# Altium PCB 数粒机接收板12通道.PcbDoc (part 1 of 2)
Units mm, origin at the board's own origin, x right, y up, seen from the top; angles counter-clockwise.
Board outline 316 x 52 mm, 2 copper layers (Top Layer, Bottom Layer); 209 components, 115 nets, 614 pads, 284 vias.
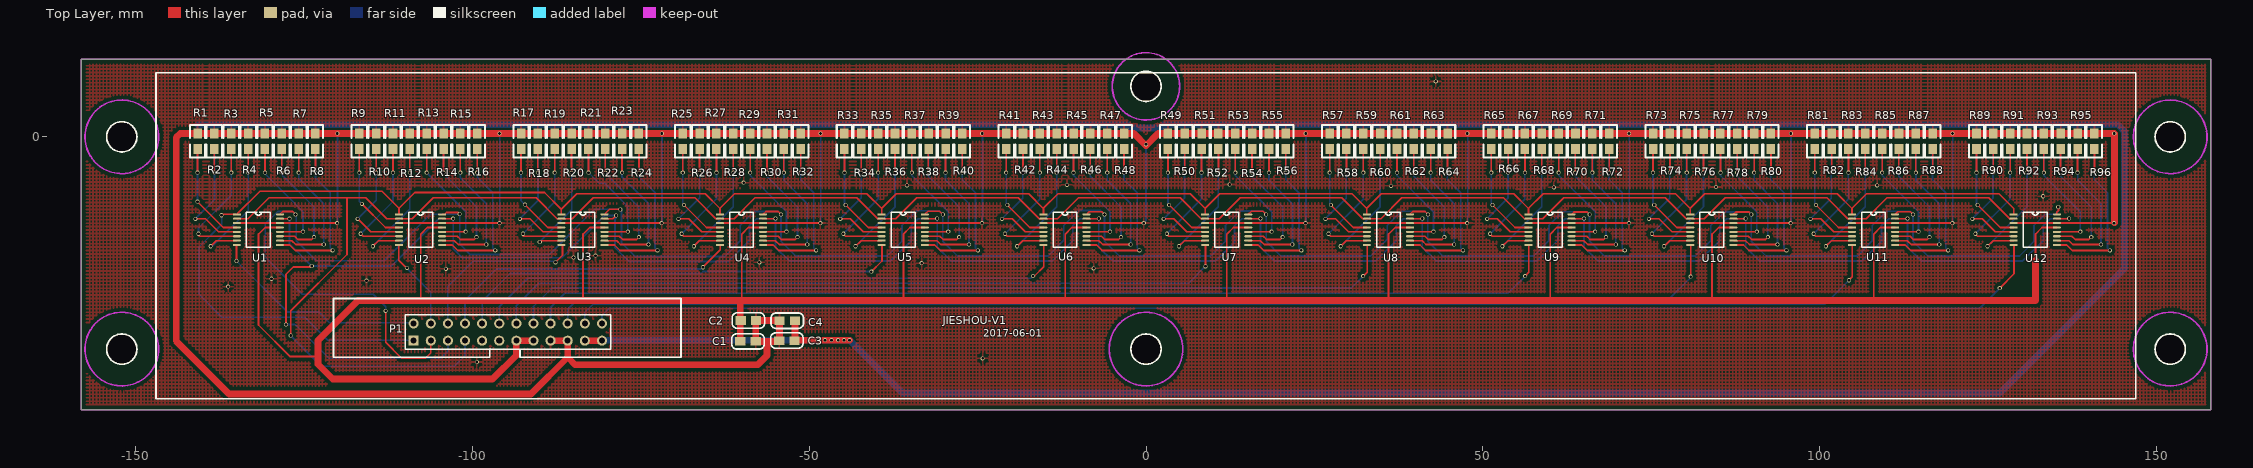
[diagram p0: Top Layer view]
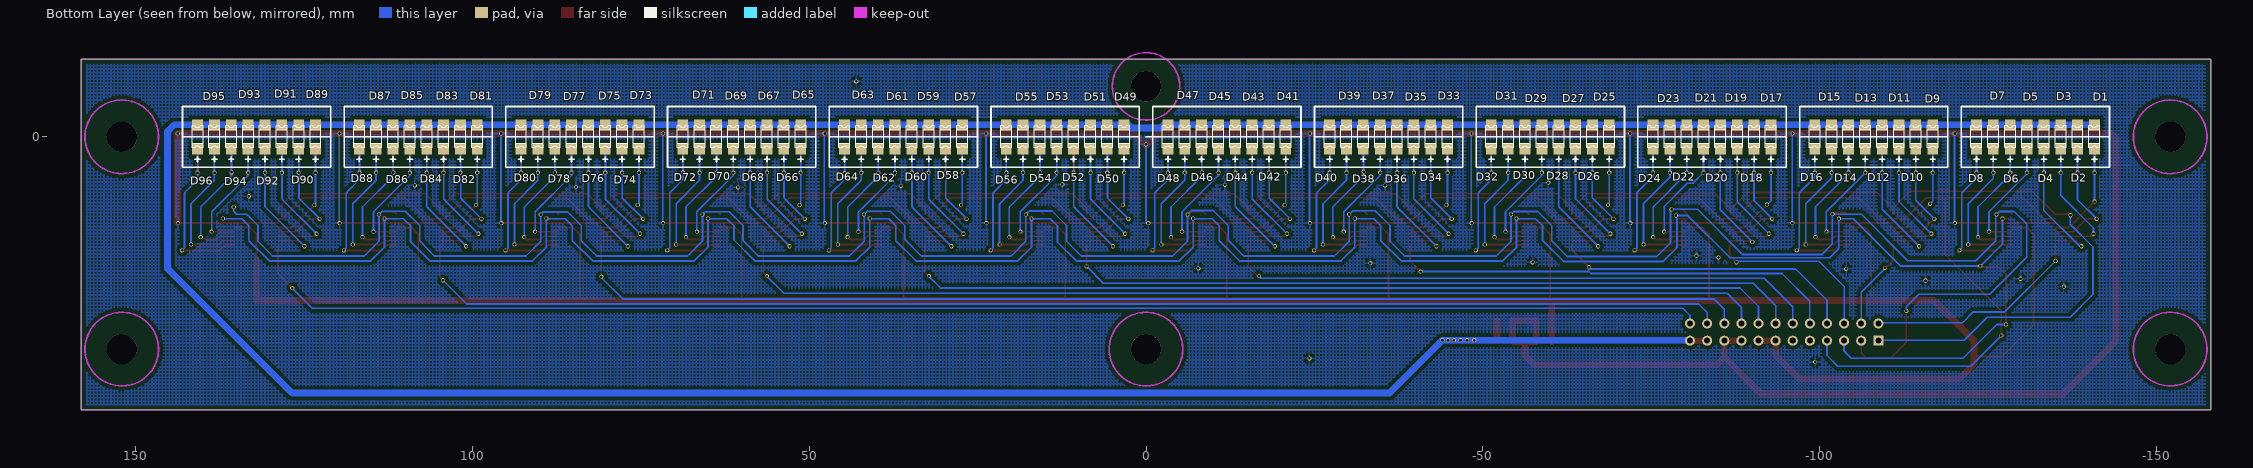
[diagram p1: Bottom Layer view, seen from below]

## Layer stack, top to bottom
Top Layer: signal copper 0.0356
Dielectric: dielectric 0.32, FR-4, Dk 4.8
Bottom Layer: signal copper 0.0356

## Board outline
-158,11.5 -158,-40.5 158,-40.5 158,11.5

## Design rules (kind name [scope] priority, off if disabled: settings)
Clearance Clearance_1 [InPolygon] p1: gap=0.508
Clearance [All] p2: gap=0.2
HoleSize [All] p1 off: absolutevalues=TRUE maxlimit=2.54 minlimit=0.025 maxpercent=80.000 minpercent=20.000
MinimumSolderMaskSliver [All] p1 off: minsoldermaskwidth=0.2
PolygonConnect [All] p1: connectstyle=Relief reliefconductorwidth=0.254 reliefentries=4 polygonreliefangle="90 Angle"
RoutingVias [All] p1: holewidth=0.254 width=0.6 viastyle="Through Hole" minholewidth=0.254 minwidth=0.6 maxholewidth=0.254 maxwidth=0.6
SilkToSilkClearance [All] p1: silktosilkclearance=-10
SilkscreenOverComponentPads [All] p1: minsilkscreentomaskgap=0
SolderMaskExpansion [All] p1: expansion=0.102
TestPointUsage [All] p1: valid=0 allowmultiple=FALSE
Testpoint [All] p1: side=3 testpointundercomponent=TRUE minsize=1.016 maxsize=2.54 preferedsize=1.524 minholesize=0 maxholesize=1.016 preferedholesize=0.813 testpointgrid=0.025 style=297 order=0123456789
Width [All] p1: maxlimit=2 minlimit=0.254 preferedwidth=0.254
20 further rules are at their usual default settings.

## Components (designator, comment, footprint, x,y, rotation, side; value= is the part's Value field where it differs from the comment)
C1 "贴片电容 10uf" 0805c -57.918,-30.357 r180 top
C2 "贴片电容" 0805c -57.868,-27.258 r180 top
C3 "贴片电容 10uf" 0805c -54.439,-30.23 r0 top
C4 "贴片电容" 0805c -54.388,-27.284 r0 top
D1 "红外接收珠子" jieshou1206 -140.75,-1.8 r0 bottom
D2 "红外接收珠子" jieshou1206 -138.25,-1.8 r0 bottom
D3 "红外接收珠子" jieshou1206 -135.75,-1.8 r0 bottom
D4 "红外接收珠子" jieshou1206 -133.25,-1.8 r0 bottom
D5 "红外接收珠子" jieshou1206 -130.75,-1.8 r0 bottom
D6 "红外接收珠子" jieshou1206 -128.25,-1.8 r0 bottom
D7 "红外接收珠子" jieshou1206 -125.75,-1.8 r0 bottom
D8 "红外接收珠子" jieshou1206 -123.25,-1.8 r0 bottom
D9 "红外接收珠子" jieshou1206 -116.75,-1.8 r0 bottom
D10 "红外接收珠子" jieshou1206 -114.25,-1.8 r0 bottom
D11 "红外接收珠子" jieshou1206 -111.75,-1.8 r0 bottom
D12 "红外接收珠子" jieshou1206 -109.25,-1.8 r0 bottom
D13 "红外接收珠子" jieshou1206 -106.75,-1.8 r0 bottom
D14 "红外接收珠子" jieshou1206 -104.25,-1.8 r0 bottom
D15 "红外接收珠子" jieshou1206 -101.75,-1.8 r0 bottom
D16 "红外接收珠子" jieshou1206 -99.25,-1.8 r0 bottom
D17 "红外接收珠子" jieshou1206 -92.75,-1.8 r0 bottom
D18 "红外接收珠子" jieshou1206 -90.25,-1.8 r0 bottom
D19 "红外接收珠子" jieshou1206 -87.75,-1.8 r0 bottom
D20 "红外接收珠子" jieshou1206 -85.25,-1.8 r0 bottom
D21 "红外接收珠子" jieshou1206 -82.75,-1.8 r0 bottom
D22 "红外接收珠子" jieshou1206 -80.25,-1.8 r0 bottom
D23 "红外接收珠子" jieshou1206 -77.75,-1.8 r0 bottom
D24 "红外接收珠子" jieshou1206 -75.25,-1.8 r0 bottom
D25 "红外接收珠子" jieshou1206 -68.75,-1.8 r0 bottom
D26 "红外接收珠子" jieshou1206 -66.25,-1.8 r0 bottom
D27 "红外接收珠子" jieshou1206 -63.75,-1.8 r0 bottom
D28 "红外接收珠子" jieshou1206 -61.25,-1.8 r0 bottom
D29 "红外接收珠子" jieshou1206 -58.75,-1.8 r0 bottom
D30 "红外接收珠子" jieshou1206 -56.25,-1.8 r0 bottom
D31 "红外接收珠子" jieshou1206 -53.75,-1.8 r0 bottom
D32 "红外接收珠子" jieshou1206 -51.25,-1.8 r0 bottom
D33 "红外接收珠子" jieshou1206 -44.75,-1.8 r0 bottom
D34 "红外接收珠子" jieshou1206 -42.25,-1.8 r0 bottom
D35 "红外接收珠子" jieshou1206 -39.75,-1.8 r0 bottom
D36 "红外接收珠子" jieshou1206 -37.25,-1.8 r0 bottom
D37 "红外接收珠子" jieshou1206 -34.75,-1.8 r0 bottom
D38 "红外接收珠子" jieshou1206 -32.25,-1.8 r0 bottom
D39 "红外接收珠子" jieshou1206 -29.75,-1.8 r0 bottom
D40 "红外接收珠子" jieshou1206 -27.25,-1.8 r0 bottom
D41 "红外接收珠子" jieshou1206 -20.75,-1.8 r0 bottom
D42 "红外接收珠子" jieshou1206 -18.25,-1.8 r0 bottom
D43 "红外接收珠子" jieshou1206 -15.75,-1.8 r0 bottom
D44 "红外接收珠子" jieshou1206 -13.25,-1.8 r0 bottom
D45 "红外接收珠子" jieshou1206 -10.75,-1.8 r0 bottom
D46 "红外接收珠子" jieshou1206 -8.25,-1.8 r0 bottom
D47 "红外接收珠子" jieshou1206 -5.75,-1.8 r0 bottom
D48 "红外接收珠子" jieshou1206 -3.25,-1.8 r0 bottom
D49 "红外接收珠子" jieshou1206 3.25,-1.8 r0 bottom
D50 "红外接收珠子" jieshou1206 5.75,-1.8 r0 bottom
D51 "红外接收珠子" jieshou1206 8.25,-1.8 r0 bottom
D52 "红外接收珠子" jieshou1206 10.75,-1.8 r0 bottom
D53 "红外接收珠子" jieshou1206 13.25,-1.8 r0 bottom
D54 "红外接收珠子" jieshou1206 15.75,-1.8 r0 bottom
D55 "红外接收珠子" jieshou1206 18.25,-1.8 r0 bottom
D56 "红外接收珠子" jieshou1206 20.75,-1.8 r0 bottom
D57 "红外接收珠子" jieshou1206 27.25,-1.8 r0 bottom
D58 "红外接收珠子" jieshou1206 29.75,-1.8 r0 bottom
D59 "红外接收珠子" jieshou1206 32.25,-1.8 r0 bottom
D60 "红外接收珠子" jieshou1206 34.75,-1.8 r0 bottom
D61 "红外接收珠子" jieshou1206 37.25,-1.8 r0 bottom
D62 "红外接收珠子" jieshou1206 39.75,-1.8 r0 bottom
D63 "红外接收珠子" jieshou1206 42.25,-1.8 r0 bottom
D64 "红外接收珠子" jieshou1206 44.75,-1.8 r0 bottom
D65 "红外接收珠子" jieshou1206 51.25,-1.8 r0 bottom
D66 "红外接收珠子" jieshou1206 53.75,-1.8 r0 bottom
D67 "红外接收珠子" jieshou1206 56.25,-1.8 r0 bottom
D68 "红外接收珠子" jieshou1206 58.75,-1.8 r0 bottom
D69 "红外接收珠子" jieshou1206 61.25,-1.8 r0 bottom
D70 "红外接收珠子" jieshou1206 63.75,-1.8 r0 bottom
D71 "红外接收珠子" jieshou1206 66.25,-1.8 r0 bottom
D72 "红外接收珠子" jieshou1206 68.75,-1.8 r0 bottom
D73 "红外接收珠子" jieshou1206 75.25,-1.8 r0 bottom
D74 "红外接收珠子" jieshou1206 77.75,-1.8 r0 bottom
D75 "红外接收珠子" jieshou1206 80.25,-1.8 r0 bottom
D76 "红外接收珠子" jieshou1206 82.75,-1.8 r0 bottom
D77 "红外接收珠子" jieshou1206 85.25,-1.8 r0 bottom
D78 "红外接收珠子" jieshou1206 87.75,-1.8 r0 bottom
D79 "红外接收珠子" jieshou1206 90.25,-1.8 r0 bottom
D80 "红外接收珠子" jieshou1206 92.75,-1.8 r0 bottom
D81 "红外接收珠子" jieshou1206 99.25,-1.8 r0 bottom
D82 "红外接收珠子" jieshou1206 101.75,-1.8 r0 bottom
D83 "红外接收珠子" jieshou1206 104.25,-1.8 r0 bottom
D84 "红外接收珠子" jieshou1206 106.75,-1.8 r0 bottom
D85 "红外接收珠子" jieshou1206 109.25,-1.8 r0 bottom
D86 "红外接收珠子" jieshou1206 111.75,-1.8 r0 bottom
D87 "红外接收珠子" jieshou1206 114.25,-1.8 r0 bottom
D88 "红外接收珠子" jieshou1206 116.75,-1.8 r0 bottom
D89 "红外接收珠子" jieshou1206 123.25,-1.8 r0 bottom
D90 "红外接收珠子" jieshou1206 125.75,-1.8 r0 bottom
D91 "红外接收珠子" jieshou1206 128.25,-1.8 r0 bottom
D92 "红外接收珠子" jieshou1206 130.75,-1.8 r0 bottom
D93 "红外接收珠子" jieshou1206 133.25,-1.8 r0 bottom
D94 "红外接收珠子" jieshou1206 135.75,-1.8 r0 bottom
D95 "红外接收珠子" jieshou1206 138.25,-1.8 r0 bottom
D96 "红外接收珠子" jieshou1206 140.75,-1.8 r0 bottom
P1 "牛角插座" HDR2X12 -108.682,-30.248 r0 top
R1 "贴片电阻" 0805r -140.758,0.486 r270 top
R2 "贴片电阻" 0805r -138.258,0.486 r270 top
R3 "贴片电阻" 0805r -135.758,0.486 r270 top
R4 "贴片电阻" 0805r -133.258,0.486 r270 top
R5 "贴片电阻" 0805r -130.758,0.486 r270 top
R6 "贴片电阻" 0805r -128.258,0.486 r270 top
R7 "贴片电阻" 0805r -125.758,0.486 r270 top
R8 "贴片电阻" 0805r -123.258,0.486 r270 top
R9 "贴片电阻" 0805r -116.75,0.486 r270 top
R10 "贴片电阻" 0805r -114.25,0.486 r270 top
R11 "贴片电阻" 0805r -111.75,0.486 r270 top
R12 "贴片电阻" 0805r -109.25,0.486 r270 top
R13 "贴片电阻" 0805r -106.75,0.486 r270 top
R14 "贴片电阻" 0805r -104.25,0.486 r270 top
R15 "贴片电阻" 0805r -101.75,0.486 r270 top
R16 "贴片电阻" 0805r -99.25,0.486 r270 top
R17 "贴片电阻" 0805r -92.75,0.486 r270 top
R18 "贴片电阻" 0805r -90.25,0.486 r270 top
R19 "贴片电阻" 0805r -87.75,0.486 r270 top
R20 "贴片电阻" 0805r -85.25,0.486 r270 top
R21 "贴片电阻" 0805r -82.75,0.486 r270 top
R22 "贴片电阻" 0805r -80.25,0.486 r270 top
R23 "贴片电阻" 0805r -77.75,0.486 r270 top
R24 "贴片电阻" 0805r -75.25,0.486 r270 top
R25 "贴片电阻" 0805r -68.75,0.486 r270 top
R26 "贴片电阻" 0805r -66.25,0.486 r270 top
R27 "贴片电阻" 0805r -63.75,0.486 r270 top
R28 "贴片电阻" 0805r -61.25,0.486 r270 top
R29 "贴片电阻" 0805r -58.75,0.486 r270 top
R30 "贴片电阻" 0805r -56.25,0.486 r270 top
R31 "贴片电阻" 0805r -53.75,0.486 r270 top
R32 "贴片电阻" 0805r -51.25,0.486 r270 top
R33 "贴片电阻" 0805r -44.75,0.486 r270 top
R34 "贴片电阻" 0805r -42.25,0.486 r270 top
R35 "贴片电阻" 0805r -39.75,0.486 r270 top
R36 "贴片电阻" 0805r -37.25,0.486 r270 top
R37 "贴片电阻" 0805r -34.75,0.486 r270 top
R38 "贴片电阻" 0805r -32.25,0.486 r270 top
R39 "贴片电阻" 0805r -29.75,0.486 r270 top
R40 "贴片电阻" 0805r -27.25,0.486 r270 top
R41 "贴片电阻" 0805r -20.75,0.486 r270 top
R42 "贴片电阻" 0805r -18.25,0.486 r270 top
R43 "贴片电阻" 0805r -15.75,0.486 r270 top
R44 "贴片电阻" 0805r -13.25,0.486 r270 top
R45 "贴片电阻" 0805r -10.75,0.486 r270 top
R46 "贴片电阻" 0805r -8.25,0.486 r270 top
R47 "贴片电阻" 0805r -5.75,0.486 r270 top
R48 "贴片电阻" 0805r -3.25,0.486 r270 top
R49 "贴片电阻" 0805r 3.25,0.486 r270 top
R50 "贴片电阻" 0805r 5.75,0.486 r270 top
R51 "贴片电阻" 0805r 8.25,0.486 r270 top
R52 "贴片电阻" 0805r 10.75,0.486 r270 top
R53 "贴片电阻" 0805r 13.25,0.486 r270 top
R54 "贴片电阻" 0805r 15.75,0.486 r270 top
R55 "贴片电阻" 0805r 18.25,0.486 r270 top
R56 "贴片电阻" 0805r 20.75,0.486 r270 top
R57 "贴片电阻" 0805r 27.25,0.486 r270 top
R58 "贴片电阻" 0805r 29.75,0.486 r270 top
R59 "贴片电阻" 0805r 32.25,0.486 r270 top
R60 "贴片电阻" 0805r 34.75,0.486 r270 top
R61 "贴片电阻" 0805r 37.25,0.486 r270 top
R62 "贴片电阻" 0805r 39.75,0.486 r270 top
R63 "贴片电阻" 0805r 42.25,0.486 r270 top
R64 "贴片电阻" 0805r 44.75,0.486 r270 top
R65 "贴片电阻" 0805r 51.242,0.486 r270 top
R66 "贴片电阻" 0805r 53.742,0.486 r270 top
R67 "贴片电阻" 0805r 56.242,0.486 r270 top
R68 "贴片电阻" 0805r 58.742,0.486 r270 top
R69 "贴片电阻" 0805r 61.242,0.486 r270 top
R70 "贴片电阻" 0805r 63.742,0.486 r270 top
R71 "贴片电阻" 0805r 66.242,0.486 r270 top
R72 "贴片电阻" 0805r 68.742,0.486 r270 top
R73 "贴片电阻" 0805r 75.25,0.486 r270 top
R74 "贴片电阻" 0805r 77.75,0.486 r270 top
R75 "贴片电阻" 0805r 80.25,0.486 r270 top
R76 "贴片电阻" 0805r 82.75,0.486 r270 top
R77 "贴片电阻" 0805r 85.25,0.486 r270 top
R78 "贴片电阻" 0805r 87.75,0.486 r270 top
R79 "贴片电阻" 0805r 90.25,0.486 r270 top
R80 "贴片电阻" 0805r 92.75,0.486 r270 top
R81 "贴片电阻" 0805r 99.25,0.486 r270 top
R82 "贴片电阻" 0805r 101.75,0.486 r270 top
R83 "贴片电阻" 0805r 104.25,0.486 r270 top
R84 "贴片电阻" 0805r 106.75,0.486 r270 top
R85 "贴片电阻" 0805r 109.25,0.486 r270 top
R86 "贴片电阻" 0805r 111.75,0.486 r270 top
R87 "贴片电阻" 0805r 114.25,0.486 r270 top
R88 "贴片电阻" 0805r 116.75,0.486 r270 top
R89 "贴片电阻" 0805r 123.25,0.486 r270 top
R90 "贴片电阻" 0805r 125.75,0.486 r270 top
R91 "贴片电阻" 0805r 128.25,0.486 r270 top
R92 "贴片电阻" 0805r 130.75,0.486 r270 top
R93 "贴片电阻" 0805r 133.25,0.486 r270 top
R94 "贴片电阻" 0805r 135.75,0.486 r270 top
R95 "贴片电阻" 0805r 138.25,0.486 r270 top
R96 "贴片电阻" 0805r 140.75,0.486 r270 top
U1 "集成电路" TSSOP16 -134.931,-11.5 r0 top
U2 "集成电路" TSSOP16 -110.852,-11.5 r0 top
U3 "集成电路" TSSOP16 -86.773,-11.5 r0 top
U4 "集成电路" TSSOP16 -63.227,-11.5 r0 top
U5 "集成电路" TSSOP16 -39.227,-11.5 r0 top
U6 "集成电路" TSSOP16 -15.227,-11.5 r0 top
U7 "集成电路" TSSOP16 8.773,-11.5 r0 top
U8 "集成电路" TSSOP16 32.773,-11.5 r0 top
U9 "集成电路" TSSOP16 56.773,-11.5 r0 top
U10 "集成电路" TSSOP16 80.773,-11.5 r0 top
U11 "集成电路" TSSOP16 104.773,-11.5 r0 top
U12 "集成电路" TSSOP16 128.773,-11.5 r0 top

## Footprints (in the part's own frame and the unit in brackets; to place one, negate y for a bottom-side part, rotate by r counter-clockwise, add the part's x,y. Pads: shape width x height; smd on the part's side, far side on the other; paste and mask are expansions set on the pad)
0805c [mil]
  rect 60x50 smd: 1(0,0) 2(90,0)
  silkscreen extent -50,-45 140,45
0805r [mil]
  rect 60x50 smd: 1(0,0) 2(90,0)
  silkscreen extent -50,-45 140,45
HDR2X12 [mm] "Connector; Header; 12x2 Position"
  rect 1.5x1.5 hole 0.9: 1(0,0)
  round 1.5 hole 0.9: 2(0,2.54) 3(2.54,0) 4(2.54,2.54) 5(5.08,0) 6(5.08,2.54) 7(7.62,0) 8(7.62,2.54) 9(10.16,0) 10(10.16,2.54) 11(12.7,0) 12(12.7,2.54) 13(15.24,0) 14(15.24,2.54) 15(17.78,0) 16(17.78,2.54) 17(20.32,0) 18(20.32,2.54) 19(22.86,0) 20(22.86,2.54) 21(25.4,0) 22(25.4,2.54) 23(27.94,0) 24(27.94,2.54)
  silkscreen extent -1.27,-1.27 29.21,3.81
jieshou1206 [mm]
  rect 1.6x1.6 smd: 1(0,0) 2(0,-3.6)
  silkscreen extent -0.8,-3.41 0.82,1.9
TSSOP16 [mm] "ADG708"
  rect 1.2x0.3 smd: 1(0,0)
  oval 1.2x0.3 smd: 2(0,-0.65) 3(0,-1.3) 4(0,-1.95) 5(0,-2.6) 6(0,-3.25) 7(0,-3.9) 8(0,-4.55) 9(6.4,-4.55) 10(6.4,-3.9) 11(6.4,-3.25) 12(6.4,-2.6) 13(6.4,-1.95) 14(6.4,-1.3) 15(6.4,-0.65) 16(6.4,0)
  silkscreen extent 1.43,-4.88 4.96,0.33

## Part data
C1 C2 C3 C4: library part Cap, "Capacitor"
D1 D2 D3 D4 D5 D6 D7 D8 D9 D10 D11 D12 D13 D14 D15 D16 D17 D18 D19 D20 D21 D22 D23 D24 D25 D26 D27 D28 D29 D30 D31 D32 D33 D34 D35 D36 D37 D38 D39 D40 D41 D42 D43 D44 D45 D46 D47 D48 D49 D50 D51 D52 D53 D54 D55 D56 D57 D58 D59 D60 D61 D62 D63 D64 D65 D66 D67 D68 D69 D70 D71 D72 D73 D74 D75 D76 D77 D78 D79 D80 D81 D82 D83 D84 D85 D86 D87 D88 D89 D90 D91 D92 D93 D94 D95 D96: library part LED0, "PD15-21B/TR8"
P1: library part "Header 12X2", "Header, 12-Pin, Dual row"
R1 R2 R3 R4 R5 R6 R7 R8 R9 R10 R11 R12 R13 R14 R15 R16 R17 R18 R19 R20 R21 R22 R23 R24 R25 R26 R27 R28 R29 R30 R31 R32: library part Res3
R33 R34 R35 R36 R37 R38 R39 R40 R41 R42 R43 R44 R45 R46 R47 R48 R49 R50 R51 R52 R53 R54 R55 R56 R57 R58 R59 R60 R61 R62 R63 R64 R65 R66 R67 R68 R69 R70 R71 R72 R73 R74 R75 R76 R77 R78 R79 R80 R81 R82 R83 R84 R85 R86 R87 R88 R89 R90 R91 R92 R93 R94 R95 R96: library part Res3, "电阻"
U1 U2 U3 U4: library part ADG708
U5 U6 U7 U8 U9 U10 U11 U12: library part ADG708, "ADG708BRU-REEL"

## Free pads (board coordinates)
  round 4.5 hole 4.5 unplated: 1(-152,0) 2(-152,-31.5) 2(0,-31.5) 2(0,7.5) 5(152,0) 6(152,-31.5)

## Via types
v1: diameter 0.6, hole 0.4, Top Layer to Bottom Layer, 284 vias

## Nets (pads, with @x,y where several pads share a name; then routed paths per layer and width w, separated by ;. In a path a pad name is that pad's centre, name@x,y a point inside that pad or via, vN(x,y) a via of type N, cw(c..) or ccw(c..) an arc to the next point about the centre after c; other vN are vias at no path point)
A0: P1.1 U1.1 U2.1 U3.1 U4.1 U5.1 U6.1 U7.1 U8.1 U9.1 U10.1 U11.1 U12.1 | length 350.7
  Top Layer w0.254: v1(-137.192,-11.637) -137.055,-11.5 U1.1@-134.931,-11.5 -131.487,-8.056 -113.392,-8.056 -110.852,-10.596 ; U2.1@-110.852,-11.5 -110.852,-10.596 ; U3.1@-86.773,-11.5 -86.773,-10.748 ; U4.1@-63.227,-11.5 -63.227,-10.6 -61.064,-8.437 -41.418,-8.437 -39.227,-10.628 ; -63.227,-10.628 -65.418,-8.437 -84.461,-8.437 -86.773,-10.748 ; -15.227,-10.628 -17.418,-8.437 -37.064,-8.437 -39.227,-10.6 ; 8.773,-10.628 6.582,-8.437 -13.064,-8.437 -15.227,-10.6 ; 32.773,-10.628 30.582,-8.437 10.936,-8.437 8.773,-10.6 ; 56.773,-10.628 54.582,-8.437 34.936,-8.437 32.773,-10.6 ; 80.773,-10.628 78.582,-8.437 58.936,-8.437 56.773,-10.6 ; 104.773,-10.628 102.582,-8.437 82.936,-8.437 80.773,-10.6 ; U12.1@128.773,-11.5 128.773,-10.6 ; 128.773,-10.628 126.582,-8.437 106.936,-8.437 104.773,-10.6 ; -110.852,-10.596 -108.515,-8.259 -89.262,-8.259 -86.773,-10.748 ; -39.227,-10.6 U5.1@-39.227,-11.5 -39.227,-10.6 ; -15.227,-10.6 U6.1@-15.227,-11.5 -15.227,-10.6 ; 8.773,-10.6 U7.1@8.773,-11.5 8.773,-10.6 ; 32.773,-10.6 U8.1@32.773,-11.5 32.773,-10.6 ; 56.773,-10.6 U9.1@56.773,-11.5 56.773,-10.6 ; 80.773,-10.6 U10.1@80.773,-11.5 80.773,-10.6 ; 104.773,-10.6 U11.1@104.773,-11.5 104.773,-10.6
  Bottom Layer w0.254: v1(-137.192,-11.637) -137.166,-11.663 -137.166,-12.958 -140.545,-16.336 -140.545,-23.372 -137.141,-26.776 -124.854,-26.776 -121.458,-30.172 P1.1@-108.682,-30.172
A1: P1.3 U1.16 U2.16 U3.16 U4.16 U5.16 U6.16 U7.16 U8.16 U9.16 U10.16 U11.16 U12.16 | length 441.1
  Top Layer w0.254: U1.16@-128.531,-11.5 -128.106,-11.074 -126.655,-11.074 v1(-126.219,-11.51) ; v1(-112.847,-25.828) -112.847,-30.502 -110.536,-32.813 -106.878,-32.813 -106.142,-32.077 P1.3@-106.142,-30.248 ; U2.16@-104.452,-11.5 -104.083,-11.5 -103.81,-11.227 -102.108,-11.227 -101.921,-11.413 v1@-101.921,-11.5 ; U3.16@-80.373,-11.5 -79.617,-10.744 -78.054,-10.744 v1(-78.003,-10.795) ; U4.16@-56.827,-11.5 -56.401,-11.074 -54.595,-11.074 v1(-54.159,-11.51) ; U5.16@-32.827,-11.5 -32.351,-11.024 -30.646,-11.024 v1(-30.159,-11.51) ; U6.16@-8.827,-11.5 -8.427,-11.1 -6.57,-11.1 v1(-6.159,-11.51) ; U7.16@15.173,-11.5 15.649,-11.024 17.354,-11.024 v1(17.841,-11.51) ; U8.16@39.173,-11.5 39.599,-11.074 41.405,-11.074 v1(41.841,-11.51) ; U9.16@63.173,-11.5 63.522,-11.151 65.481,-11.151 v1(65.841,-11.51) ; U10.16@87.173,-11.5 87.522,-11.151 89.481,-11.151 v1(89.841,-11.51) ; U11.16@111.173,-11.5 111.548,-11.125 113.456,-11.125 v1(113.841,-11.51) ; U12.16@135.173,-11.5 135.173,-11.18 135.41,-10.943 135.41,-10.442 v1(135.382,-10.414)
  Bottom Layer w0.254: v1(-112.847,-25.828) -112.847,-25.205 -114.68,-23.372 -125.203,-23.372 -130.689,-17.886 -130.689,-12.907 -128.857,-11.074 -126.655,-11.074 -126.092,-11.637 -126.092,-15.396 -123.12,-18.368 -113.062,-18.368 -106.194,-11.5 -101.901,-11.5 v1(-101.86,-11.459) -101.86,-15.904 -100.294,-17.471 -88.568,-17.471 -81.841,-10.744 -77.832,-10.744 -77.832,-15.701 -75.782,-17.751 -62.534,-17.751 -60.204,-15.422 -60.204,-13.161 -58.118,-11.074 -54.595,-11.074 v1@-54.169,-11.5 ; v1@-54.169,-11.51 v1@-54.169,-11.5 ; v1@-30.169,-11.5 -30.169,-15.488 -27.982,-17.675 -14.524,-17.675 -12.204,-15.355 -12.204,-13.161 -9.965,-10.922 -6.747,-10.922 v1(-6.159,-11.51) ; v1(-30.159,-11.51) -30.697,-10.973 -34.016,-10.973 -36.204,-13.161 -36.204,-15.505 -38.375,-17.675 -51.982,-17.675 -54.159,-15.498 v1(-54.159,-11.51) v1@-54.169,-11.5 ; v1@-6.169,-11.5 -6.169,-15.488 -3.982,-17.675 9.603,-17.675 11.796,-15.482 11.796,-13.161 13.959,-10.998 17.329,-10.998 v1(17.841,-11.51) ; v1@17.831,-11.5 17.831,-15.488 20.018,-17.675 33.33,-17.675 35.796,-15.209 35.796,-13.161 37.908,-11.049 41.38,-11.049 v1(41.841,-11.51) ; v1@41.831,-11.5 41.831,-15.488 44.018,-17.675 57.536,-17.675 59.796,-15.415 59.796,-13.161 61.857,-11.1 65.43,-11.1 v1(65.841,-11.51) ; v1@65.831,-11.5 65.831,-15.488 68.018,-17.675 81.539,-17.675 83.796,-15.418 83.796,-13.161 85.806,-11.151 89.481,-11.151 v1(89.841,-11.51) ; v1@89.831,-11.5 89.831,-15.488 92.018,-17.675 105.625,-17.675 107.796,-15.422 107.796,-13.161 109.933,-11.024 113.354,-11.024 v1(113.841,-11.51) ; v1@113.831,-11.5 113.831,-15.488 116.018,-17.675 129.625,-17.675 131.796,-15.505 131.796,-13.161 133.464,-11.493 134.917,-11.493 135.394,-11.015 135.394,-10.426 v1(135.382,-10.414)
A2: P1.5 U1.15 U2.15 U3.15 U4.15 U5.15 U6.15 U7.15 U8.15 U9.15 U10.15 U11.15 U12.15 | length 423
  Top Layer w0.254: U1.15@-128.531,-12.15 v1(-127.113,-12.15) ; v1(-127.626,-27.853) -127.626,-20.389 -126.545,-19.308 -123.933,-19.308 v1(-123.806,-19.181) ; U2.15@-104.452,-12.15 v1(-102.826,-12.15) ; U3.15@-80.467,-12.167 -79.121,-12.167 v1(-78.638,-11.684) ; U4.15@-56.827,-12.15 -55.028,-12.15 v1(-54.997,-12.12) ; U5.15@-32.827,-12.15 -31.028,-12.15 v1(-30.997,-12.12) ; U6.15@-8.827,-12.15 -7.028,-12.15 v1(-6.997,-12.12) ; U7.15@15.173,-12.15 16.972,-12.15 v1(17.003,-12.12) ; U8.15@39.173,-12.15 40.972,-12.15 v1(41.003,-12.12) ; U9.15@63.173,-12.15 64.972,-12.15 v1(65.003,-12.12) ; U10.15@87.173,-12.15 88.972,-12.15 v1(89.003,-12.12) ; U11.15@111.173,-12.15 112.972,-12.15 v1(113.003,-12.12) ; U12.15@135.173,-12.15 136.972,-12.15 v1(137.003,-12.12)
  Bottom Layer w0.254: v1(-127.626,-27.853) -126.266,-27.853 -121.255,-32.864 -104.669,-32.864 -103.602,-31.797 P1.5@-103.602,-30.248 ; v1(-127.113,-12.15) -127.113,-15.874 v1(-123.806,-19.181) -111.995,-19.181 -104.964,-12.15 v1(-102.826,-12.15) -102.826,-16.59 -101.461,-17.954 -86.664,-17.954 -80.393,-11.684 v1(-78.638,-11.684) -78.638,-12.037 -78.797,-12.196 -78.797,-16.438 -76.747,-18.488 -61.95,-18.488 -58.858,-15.396 -58.858,-13.212 -57.796,-12.15 -55.028,-12.15 v1(-54.997,-12.12) -54.997,-16.362 -52.947,-18.412 -37.873,-18.412 -34.858,-15.396 -34.858,-13.212 -33.796,-12.15 -31.028,-12.15 v1(-30.997,-12.12) -30.997,-16.362 -28.947,-18.412 -13.873,-18.412 -10.858,-15.396 -10.858,-13.212 -9.796,-12.15 -7.028,-12.15 v1(-6.997,-12.12) -6.997,-16.362 -4.947,-18.412 10.368,-18.412 13.142,-15.638 13.142,-13.212 14.204,-12.15 16.972,-12.15 v1(17.003,-12.12) 17.003,-16.362 19.053,-18.412 34.127,-18.412 37.142,-15.396 37.142,-13.212 38.204,-12.15 40.972,-12.15 v1(41.003,-12.12) 41.003,-16.362 43.053,-18.412 58.044,-18.412 61.142,-15.314 61.142,-13.212 62.204,-12.15 64.972,-12.15 v1(65.003,-12.12) 65.003,-16.362 67.053,-18.412 82.127,-18.412 85.142,-15.396 85.142,-13.212 86.204,-12.15 88.972,-12.15 v1(89.003,-12.12) 89.003,-16.362 91.053,-18.412 106.278,-18.412 109.142,-15.548 109.142,-13.212 110.204,-12.15 112.972,-12.15 v1(113.003,-12.12) 113.003,-16.362 115.053,-18.412 130.127,-18.412 133.142,-15.396 133.142,-13.212 134.204,-12.15 136.972,-12.15 v1(137.003,-12.12)
CH1: P1.2 U1.8 | length 32.5
  Top Layer w0.254: v1(-134.982,-18.419) -134.982,-16.101 U1.8@-134.931,-16.05
  Bottom Layer w0.254: v1(-134.982,-18.419) -127.42,-25.981 -122.779,-25.981 -121.179,-27.581 P1.2@-108.682,-27.581
CH1-1: D1.1 R1.2 U1.4 | length 18.8
  Top Layer w0.254: v1(-140.758,-9.628) -136.935,-13.45 U1.4@-134.931,-13.45 ; R1.2@-140.758,-1.8 -140.75,-1.808 v1(-140.75,-5.309)
  Bottom Layer w0.254: v1(-140.758,-9.628) -140.75,-9.62 v1(-140.75,-5.309) D1.1@-140.75,-1.8
CH1-2: D2.1 R2.2 U1.5 | length 22
  Top Layer w0.254: v1(-141.078,-12.171) -139.579,-12.171 -137.65,-14.1 U1.5@-134.931,-14.1 ; v1(-138.258,-5.309) R2.2@-138.258,-1.8
  Bottom Layer w0.254: v1(-141.078,-12.171) -138.25,-9.343 D2.1@-138.25,-1.8
CH1-3: D3.1 R3.2 U1.6 | length 24.1
  Top Layer w0.254: v1(-140.621,-14.38) -140.621,-14.609 -140.48,-14.75 U1.6@-134.931,-14.75 ; R3.2@-135.758,-1.8 -135.75,-1.808 v1(-135.75,-5.309)
  Bottom Layer w0.254: v1(-140.621,-14.38) -140.621,-13.517 -135.75,-8.646 v1(-135.75,-5.309) D3.1@-135.75,-1.8
CH1-4: D4.1 R4.2 U1.7 | length 24.6
  Top Layer w0.254: v1(-138.817,-16.237) -137.981,-15.4 U1.7@-134.931,-15.4 ; R4.2@-133.258,-1.8 -133.25,-1.808 v1(-133.25,-5.309)
  Bottom Layer w0.254: v1(-138.817,-16.237) -138.556,-16.237 -133.25,-10.931 v1(-133.25,-5.309) D4.1@-133.25,-1.8
CH1-5: D5.1 R5.2 U1.12 | length 21.6
  Top Layer w0.254: v1(-130.758,-5.309) R5.2@-130.758,-1.8 ; U1.12@-128.531,-14.1 -125.126,-14.1 v1(-125.101,-14.076)
  Bottom Layer w0.254: D5.1@-130.75,-1.8 -130.75,-5.481 -125.101,-11.129 v1(-125.101,-14.076)
CH1-6: D6.1 R6.2 U1.11 | length 24
  Top Layer w0.254: U1.11@-128.531,-14.75 -126.357,-14.75 -125.863,-15.244 -123.831,-15.244 v1(-123.476,-14.888) ; v1(-128.258,-5.309) R6.2@-128.258,-1.8
  Bottom Layer w0.254: D6.1@-128.25,-1.8 -128.25,-5.644 -123.476,-10.418 v1(-123.476,-14.888)
CH1-7: D7.1 R7.2 U1.10 | length 26
  Top Layer w0.254: U1.10@-128.531,-15.4 -126.774,-15.4 -126.194,-15.981 v1(-122.028,-15.981) ; R7.2@-125.758,-1.8 -125.75,-1.808 v1(-125.75,-5.309)
  Bottom Layer w0.254: D7.1@-125.75,-1.8 v1(-125.75,-5.309) -125.75,-6.188 -122.028,-9.91 v1(-122.028,-15.981)
CH1-8: D8.1 R8.2 U1.9 | length 27.8
  Top Layer w0.254: U1.9@-128.531,-16.05 -127.089,-16.05 -126.27,-16.87 -120.733,-16.87 v1(-120.707,-16.844) ; R8.2@-123.258,-1.8 -123.25,-1.808 v1(-123.25,-5.309)
  Bottom Layer w0.254: D8.1@-123.25,-1.8 v1(-123.25,-5.309) -123.25,-6.123 -121.063,-8.31 -121.063,-16.489 v1(-120.707,-16.844)
CH2: P1.4 U2.8 | length 13.7
  Top Layer w0.254: U2.8@-110.852,-16.05 -110.903,-16.101 -110.903,-18.317 -109.785,-19.435 v1(-109.684,-19.435)
  Bottom Layer w0.254: v1(-109.684,-19.435) -109.709,-19.46 -109.709,-19.486 -106.153,-23.042 -106.153,-24.236 -106.142,-24.247 P1.4@-106.142,-27.708
CH2-1: D9.1 R9.2 U2.4 | length 18.8
  Top Layer w0.254: v1(-116.75,-5.309) R9.2@-116.75,-1.8 ; v1(-116.371,-9.935) -112.856,-13.45 U2.4@-110.852,-13.45
  Bottom Layer w0.254: v1(-116.75,-5.309) v1@-116.738,-5.32 ; v1@-116.679,-5.38 v1@-116.738,-5.32 ; D9.1@-116.679,-1.871 -116.738,-1.931 v1@-116.738,-5.32 ; v1(-116.371,-9.935) -116.738,-9.568 v1@-116.738,-5.32
CH2-2: D10.1 R10.2 U2.5 | length 22
  Top Layer w0.254: v1(-116.999,-12.171) -115.069,-14.1 U2.5@-110.852,-14.1 ; v1(-114.25,-5.309) R10.2@-114.25,-1.8
  Bottom Layer w0.254: v1(-116.999,-12.171) -114.249,-9.421 -114.249,-1.878 D10.1@-114.171,-1.8
CH2-3: D11.1 R11.2 U2.6 | length 23.9
  Top Layer w0.254: v1(-116.542,-14.38) -116.172,-14.75 U2.6@-110.852,-14.75 ; v1(-111.75,-5.309) R11.2@-111.75,-1.8
  Bottom Layer w0.254: v1(-116.542,-14.38) -111.76,-9.599 -111.76,-1.889 D11.1@-111.671,-1.8
CH2-4: D12.1 R12.2 U2.7 | length 24.5
  Top Layer w0.254: v1(-114.738,-16.237) -113.901,-15.4 U2.7@-110.852,-15.4 ; v1(-109.25,-5.309) R12.2@-109.25,-1.8
  Bottom Layer w0.254: v1(-114.738,-16.237) -109.245,-10.744 -109.245,-1.875 D12.1@-109.171,-1.8
CH2-5: D13.1 R13.2 U2.12 | length 21.7
  Top Layer w0.254: v1(-106.75,-5.309) R13.2@-106.75,-1.8 ; U2.12@-104.401,-14.1 -100.996,-14.1 v1(-100.971,-14.076)
  Bottom Layer w0.254: D13.1@-106.62,-1.8 -106.756,-1.936 -106.756,-5.344 -100.971,-11.129 v1(-100.971,-14.076)
CH2-6: D14.1 R14.2 U2.11 | length 24.1
  Top Layer w0.254: U2.11@-104.401,-14.75 -102.227,-14.75 -101.733,-15.244 -99.701,-15.244 v1(-99.346,-14.888) ; v1(-104.25,-5.309) R14.2@-104.25,-1.8
  Bottom Layer w0.254: D14.1@-104.12,-1.8 -104.242,-1.922 -104.242,-5.522 -99.346,-10.418 v1(-99.346,-14.888)
CH2-7: D15.1 R15.2 U2.10 | length 26.1
  Top Layer w0.254: U2.10@-104.401,-15.4 -102.644,-15.4 -102.064,-15.981 v1(-97.898,-15.981) ; v1(-101.75,-5.309) R15.2@-101.75,-1.8
  Bottom Layer w0.254: D15.1@-101.62,-1.8 -101.752,-1.932 -101.752,-6.056 -97.898,-9.91 v1(-97.898,-15.981)
CH2-8: D16.1 R16.2 U2.9 | length 27.9
  Top Layer w0.254: U2.9@-104.401,-16.05 -102.959,-16.05 -102.14,-16.87 -96.603,-16.87 v1(-96.577,-16.844) ; v1(-99.25,-5.309) R16.2@-99.25,-1.8
  Bottom Layer w0.254: D16.1@-99.12,-1.8 -99.263,-1.943 -99.263,-5.979 -96.933,-8.31 -96.933,-16.489 v1(-96.577,-16.844)
CH3: P1.6 U3.8 | length 26.2
  Top Layer w0.254: v1(-87.634,-18.623) -86.595,-17.585 -86.595,-16.228 U3.8@-86.773,-16.05
  Bottom Layer w0.254: P1.6@-103.613,-27.708 -103.613,-22.204 -99.872,-18.462 -87.794,-18.462 v1(-87.634,-18.623)
CH3-1: D17.1 R17.2 U3.4 | length 18.7
  Top Layer w0.254: v1(-92.75,-5.309) R17.2@-92.75,-1.8 ; v1(-92.159,-10.068) -88.777,-13.45 U3.4@-86.773,-13.45
  Bottom Layer w0.254: D17.1@-92.6,-1.95 -92.761,-2.112 -92.761,-9.466 v1(-92.159,-10.068)
CH3-2: D18.1 R18.2 U3.5 | length 22
  Top Layer w0.254: v1(-92.92,-12.171) -91.421,-12.171 -89.492,-14.1 U3.5@-86.773,-14.1 ; v1(-90.25,-5.309) R18.2@-90.25,-1.8
  Bottom Layer w0.254: v1(-92.92,-12.171) -90.246,-9.497 -90.246,-1.955 D18.1@-90.092,-1.8
CH3-3: D19.1 R19.2 U3.6 | length 24.1
  Top Layer w0.254: v1(-92.462,-14.38) -92.462,-14.685 -92.398,-14.75 U3.6@-86.773,-14.75 ; v1(-87.75,-5.309) R19.2@-87.75,-1.8
  Bottom Layer w0.254: v1(-92.462,-14.38) -87.732,-9.65 -87.732,-1.94 D19.1@-87.592,-1.8
CH3-4: D20.1 R20.2 U3.7 | length 22.6
  Top Layer w0.254: v1(-89.973,-15.6) -89.973,-15.551 -89.822,-15.4 U3.7@-86.773,-15.4 ; v1(-85.25,-5.309) R20.2@-85.25,-1.8
  Bottom Layer w0.254: v1(-89.973,-15.6) -89.973,-15.551 -85.242,-10.82 -85.242,-1.951 D20.1@-85.092,-1.8
CH3-5: D21.1 R21.2 U3.12 | length 22.2
  Top Layer w0.254: v1(-82.75,-5.309) R21.2@-82.75,-1.8 ; U3.12@-80.322,-14.1 -76.917,-14.1 v1(-76.892,-14.076)
  Bottom Layer w0.254: D21.1@-82.753,-1.803 D21.1@-82.75,-1.8 ; v1(-82.75,-5.309) -82.75,-5.16 v1@-82.736,-5.147 ; v1@-82.742,-5.395 D21.1@-82.742,-1.998 ; v1@-82.728,-5.283 -81.128,-6.883 -80.34,-6.883 -76.892,-10.331 v1(-76.892,-14.076)
CH3-6: D22.1 R22.2 U3.11 | length 24.2
  Top Layer w0.254: U3.11@-80.322,-14.75 -78.148,-14.75 -77.654,-15.244 -75.622,-15.244 v1(-75.267,-14.888) ; v1(-80.25,-5.309) R22.2@-80.25,-1.8
  Bottom Layer w0.254: D22.1@-80.041,-1.8 -80.264,-2.023 -80.264,-5.421 -75.267,-10.418 v1(-75.267,-14.888)
CH3-7: D23.1 R23.2 U3.10 | length 25.9
  Top Layer w0.254: U3.10@-80.322,-15.4 -78.565,-15.4 -77.984,-15.981 v1(-73.819,-15.981) ; v1(-77.75,-5.309) R23.2@-77.75,-1.8
  Bottom Layer w0.254: D23.1@-77.752,-2.011 -77.752,-5.977 -73.819,-9.91 v1(-73.819,-15.981)
CH3-8: D24.1 R24.2 U3.9 | length 27.7
  Top Layer w0.254: U3.9@-80.322,-16.05 -78.88,-16.05 -78.061,-16.87 -72.523,-16.87 v1(-72.498,-16.844) ; v1(-75.25,-5.309) R24.2@-75.25,-1.8
  Bottom Layer w0.254: D24.1@-75.237,-1.996 -75.237,-5.926 -72.854,-8.31 -72.854,-16.489 v1(-72.498,-16.844)
CH4: P1.8 U4.8 | length 45.2
  Top Layer w0.254: v1(-65.756,-19.351) -63.176,-16.772 -63.176,-16.101 U4.8@-63.227,-16.05
  Bottom Layer w0.254: P1.8@-101.062,-27.708 -101.062,-24.224 -96.446,-19.609 -66.013,-19.609 v1(-65.756,-19.351)
CH4-1: D25.1 R25.2 U4.4 | length 18.6
  Top Layer w0.254: v1(-68.75,-5.309) R25.2@-68.75,-1.8 ; v1(-68.571,-10.111) -65.231,-13.45 U4.4@-63.227,-13.45
  Bottom Layer w0.254: D25.1@-68.75,-1.8 v1(-68.75,-5.309) -68.75,-9.931 v1(-68.571,-10.111)
CH4-2: D26.1 R26.2 U4.5 | length 21.9
  Top Layer w0.254: v1(-69.374,-12.171) -67.875,-12.171 -65.946,-14.1 U4.5@-63.227,-14.1 ; v1(-66.25,-5.309) R26.2@-66.25,-1.8
  Bottom Layer w0.254: v1(-69.374,-12.171) -66.243,-9.04 -66.243,-2.103 D26.1@-66.289,-2.057
CH4-3: D27.1 R27.2 U4.6 | length 23.8
  Top Layer w0.254: v1(-68.917,-14.38) -68.917,-14.431 -68.598,-14.75 U4.6@-63.227,-14.75 ; v1(-63.75,-5.309) R27.2@-63.75,-1.8
  Bottom Layer w0.254: v1(-68.917,-14.38) -63.754,-9.218 -63.754,-2.092 D27.1@-63.775,-2.071
CH4-4: D28.1 R28.2 U4.7 | length 24.3
  Top Layer w0.254: v1(-67.113,-16.237) -66.276,-15.4 U4.7@-63.227,-15.4 ; v1(-61.25,-5.309) R28.2@-61.25,-1.8
  Bottom Layer w0.254: v1(-67.113,-16.237) -61.26,-10.384 D28.1@-61.26,-2.086
CH4-5: D29.1 R29.2 U4.12 | length 21.2
  Top Layer w0.254: v1(-58.75,-5.309) R29.2@-58.75,-1.8 ; U4.12@-56.776,-14.1 -53.371,-14.1 v1(-53.346,-14.076)
  Bottom Layer w0.254: D29.1@-58.745,-2.05 -58.75,-2.054 -58.75,-5.725 -53.346,-11.129 v1(-53.346,-14.076)
CH4-6: D30.1 R30.2 U4.11 | length 23.7
  Top Layer w0.254: U4.11@-56.776,-14.75 -54.602,-14.75 -54.108,-15.244 -52.076,-15.244 v1(-51.721,-14.888) ; v1(-56.25,-5.309) R30.2@-56.25,-1.8
  Bottom Layer w0.254: D30.1@-56.282,-2.013 -56.236,-2.059 -56.236,-5.903 -51.721,-10.418 v1(-51.721,-14.888)
CH4-7: D31.1 R31.2 U4.10 | length 25.6
  Top Layer w0.254: U4.10@-56.776,-15.4 -55.019,-15.4 -54.439,-15.981 v1(-50.273,-15.981) ; v1(-53.75,-5.309) R31.2@-53.75,-1.8
  Bottom Layer w0.254: D31.1@-53.742,-2.053 -53.721,-2.074 -53.721,-6.462 -50.273,-9.91 v1(-50.273,-15.981)
CH4-8: D32.1 R32.2 U4.9 | length 27.5
  Top Layer w0.254: U4.9@-56.776,-16.05 -55.334,-16.05 -54.515,-16.87 -48.978,-16.87 v1(-48.952,-16.844) ; v1(-51.25,-5.309) R32.2@-51.25,-1.8
  Bottom Layer w0.254: D32.1@-51.278,-2.017 -51.232,-2.063 -51.232,-6.386 -49.308,-8.31 -49.308,-16.489 v1(-48.952,-16.844)
CH5: P1.10 U5.8 | length 67.6
  Top Layer w0.254: v1(-40.762,-20.012) -39.176,-18.426 -39.176,-16.101 U5.8@-39.227,-16.05
  Bottom Layer w0.254: P1.10@-98.522,-27.708 -98.522,-24.406 -94.385,-20.269 -66.032,-20.269 -65.749,-19.986 -40.737,-19.986 v1(-40.762,-20.012)
CH5-1: D33.1 R33.2 U5.4 | length 18.6
  Top Layer w0.254: v1(-44.75,-5.309) R33.2@-44.75,-1.8 ; v1(-44.571,-10.111) -41.231,-13.45 U5.4@-39.227,-13.45
  Bottom Layer w0.254: D33.1@-44.75,-1.8 -44.75,-9.931 v1(-44.571,-10.111)
CH5-2: D34.1 R34.2 U5.5 | length 21.9
  Top Layer w0.254: v1(-45.374,-12.171) -43.875,-12.171 -41.946,-14.1 U5.5@-39.227,-14.1 ; v1(-42.25,-5.309) R34.2@-42.25,-1.8
  Bottom Layer w0.254: v1(-45.374,-12.171) -42.24,-9.037 -42.24,-2.106 D34.1@-42.289,-2.057
CH5-3: D35.1 R35.2 U5.6 | length 23.9
  Top Layer w0.254: v1(-44.917,-14.38) -44.917,-14.431 -44.598,-14.75 U5.6@-39.227,-14.75 ; v1(-39.75,-5.309) R35.2@-39.75,-1.8
  Bottom Layer w0.254: v1(-44.917,-14.38) -39.726,-9.189 -39.726,-2.12 D35.1@-39.775,-2.071
CH5-4: D36.1 R36.2 U5.7 | length 24.3
  Top Layer w0.254: v1(-43.113,-16.237) -42.276,-15.4 U5.7@-39.227,-15.4 ; v1(-37.25,-5.309) R36.2@-37.25,-1.8
  Bottom Layer w0.254: v1(-43.113,-16.237) -37.236,-10.36 -37.236,-2.109 D36.1@-37.26,-2.086